# EAGLE board Uno (EAGLE 6.1)
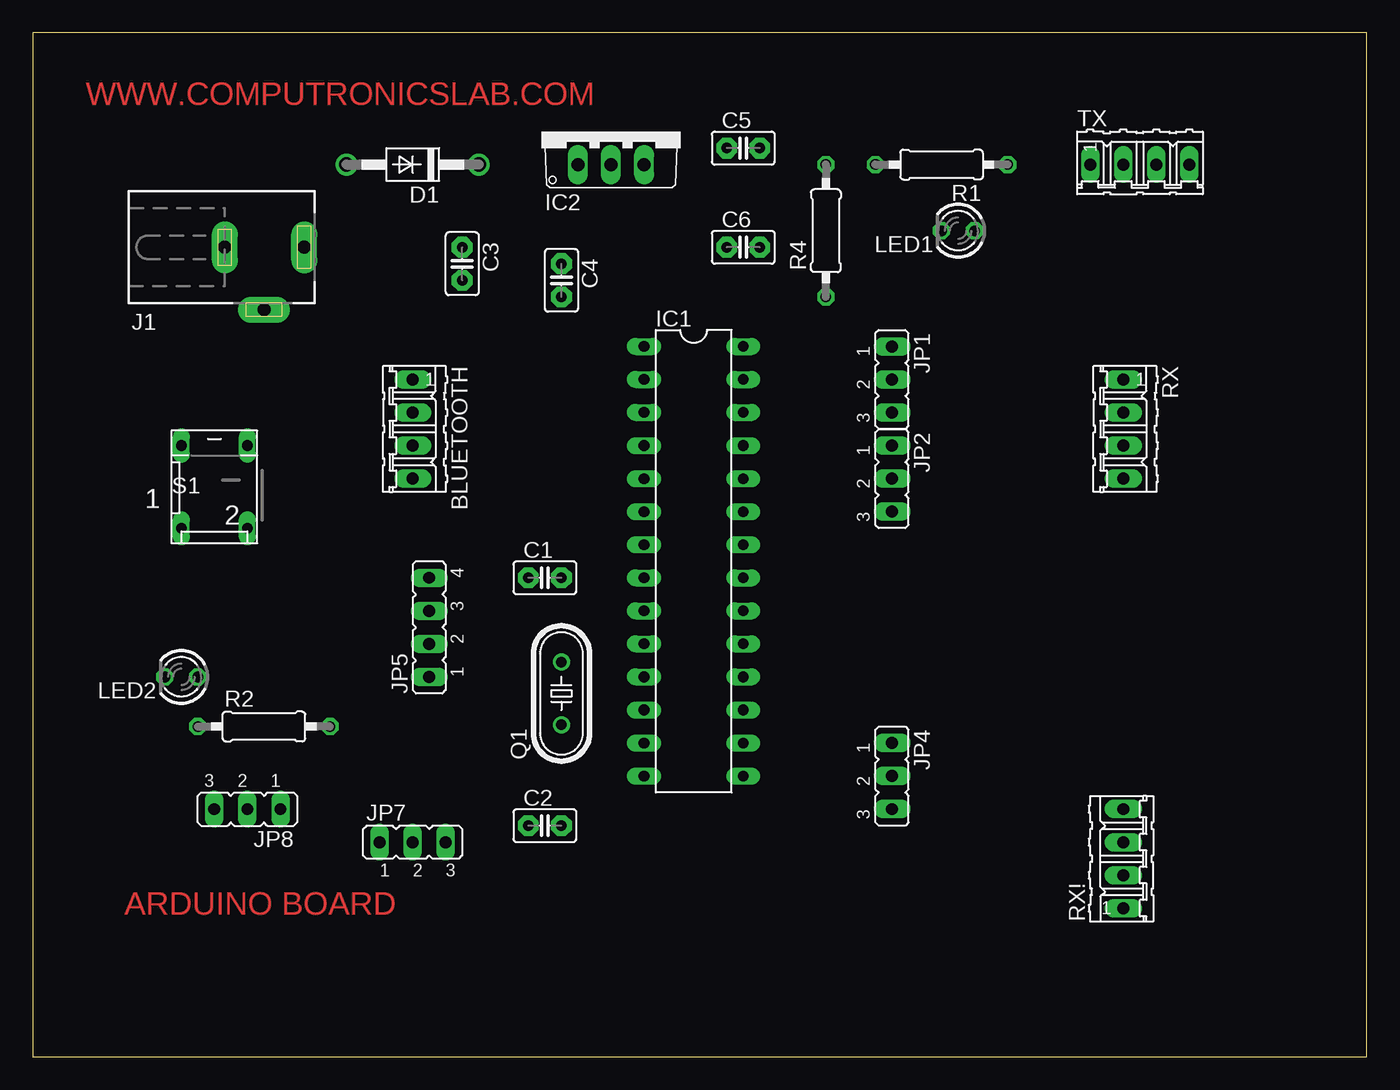
[diagram p0: board, top side]
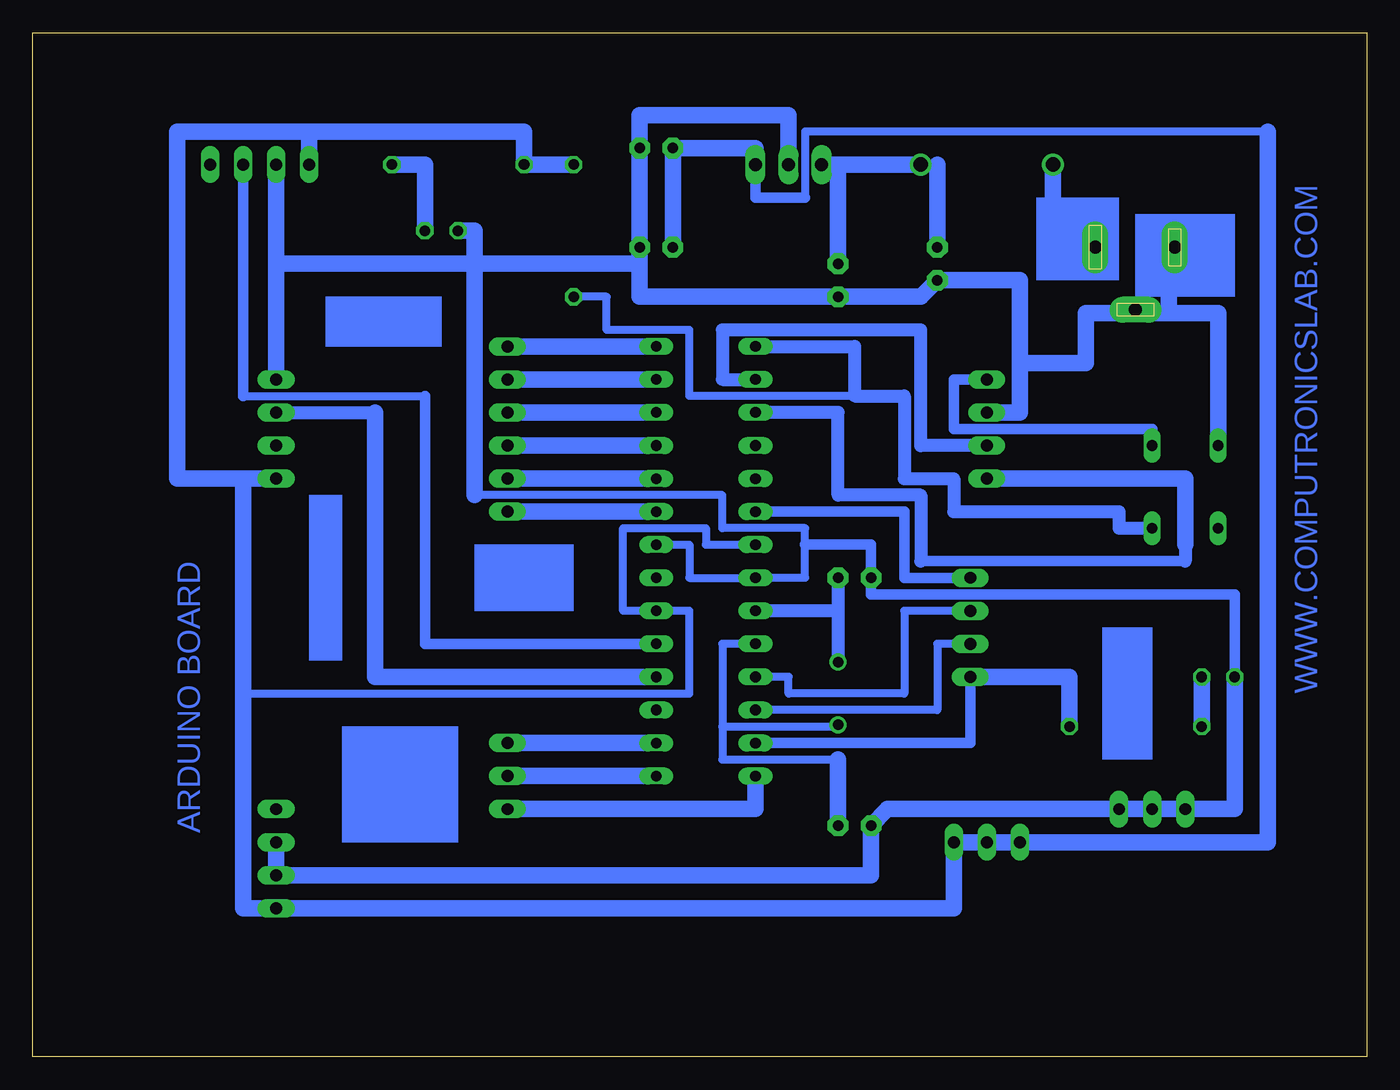
[diagram p1: board, bottom side, seen from below]

Size 102.54 x 78.73 mm. Coordinates in mm from the lower left corner, seen from the top.
Outline: 0,0 102.54,0 102.54,78.73 0,78.73 0,0
Copper layers (1*16): Top 0.035mm / dielectric 1.5mm / Bottom 0.035mm
Design rules: minimum track width 20mil, minimum drill 24mil, track to track 8mil, track to pad 8mil, pad to pad 8mil, via to via 8mil, smd to smd 8mil, copper to edge 40mil, drill to drill 8mil, minimum pad ring 10mil, minimum via ring 8mil, stop-mask expansion 4mil, vias tented up to drill 0mil, thermal gap 10mil

## Footprints (pad centres in the part's own frame; a part is rotated, then mirrored left to right if it is on the bottom)
04P = drill 0.914 long: 1 -3.81,0; 2 -1.27,0; 3 1.27,0; 4 3.81,0
C2.5-2 = drill 0.813 pad 1.6 octagon: 1 -1.27,0; 2 1.27,0
DO41-10 = drill 1.118: A 5.08,0; C -5.08,0
DIL28-3 = drill 0.813 long: 1 -16.51,-3.81; 2 -13.97,-3.81; 3 -11.43,-3.81; 4 -8.89,-3.81; 5 -6.35,-3.81; 6 -3.81,-3.81; 7 -1.27,-3.81; 8 1.27,-3.81; 9 3.81,-3.81; 10 6.35,-3.81; 11 8.89,-3.81; 12 11.43,-3.81; 13 13.97,-3.81; 14 16.51,-3.81; 15 16.51,3.81; 16 13.97,3.81; 17 11.43,3.81; 18 8.89,3.81; 19 6.35,3.81; 20 3.81,3.81; 21 1.27,3.81; 22 -1.27,3.81; 23 -3.81,3.81; 24 -6.35,3.81; 25 -8.89,3.81; 26 -11.43,3.81; 27 -13.97,3.81; 28 -16.51,3.81
TO220V = drill 1.016 long: 1 -2.54,-2.54; 2 0,-2.54; 3 2.54,-2.54
DCJ0303 = drill 1 pad 2 long: 1 0,3.1; 2 4.8,0; 3 0,-3
JP2 = drill 0.914 long: 1 -2.54,0; 2 0,0; 3 2.54,0
JP4 = drill 0.914 long: 1 -3.81,0; 2 -1.27,0; 3 1.27,0; 4 3.81,0
LED3MM = drill 0.813 octagon: A -1.27,0; K 1.27,0
HC49/S = drill 0.813: 1 -2.413,0; 2 2.413,0
0207/10 = drill 0.813 octagon: 1 -5.08,0; 2 5.08,0
DP-02 = drill 0.813 long: 1 -2.54,-2.54; 2 2.54,-2.54; 3 2.54,3.81; 4 -2.54,3.81

## Placement (x,y rotation side)
BLUETOOTH  [04P]  29.21,48.26 270 top
C1  22pf  [C2.5-2]  39.37,36.83 0 top
C2  22pf  [C2.5-2]  39.37,17.78 0 top
C3  100UF  [C2.5-2]  33.02,60.96 270 top
C4  0.1uf  [C2.5-2]  40.64,59.69 270 top
C5  0.1uf  [C2.5-2]  54.61,69.85 0 top
C6  4.7uf  [C2.5-2]  54.61,62.23 0 top
D1  1N4007  [DO41-10]  29.21,68.58 180 top
IC1  ATMEGA328  [DIL28-3]  50.8,38.1 270 top
IC2  7805  [TO220V]  44.45,71.12 0 top
J1  [DCJ0303]  17.78,62.23 270 top
JP1  [JP2]  66.04,52.07 270 top
JP2  [JP2]  66.04,44.45 270 top
JP4  [JP2]  66.04,21.59 270 top
JP5  [JP4]  30.48,33.02 90 top
JP7  [JP2]  29.21,16.51 0 top
JP8  [JP2]  16.51,19.05 180 top
LED1  [LED3MM]  71.12,63.5 180 top
LED2  [LED3MM]  11.43,29.21 180 top
Q1  12MHZ  [HC49/S]  40.64,27.94 90 top
R1  220R  [0207/10]  69.85,68.58 180 top
R2  330R  [0207/10]  17.78,25.4 0 top
R4  10K  [0207/10]  60.96,63.5 90 top
RX  [04P]  83.82,48.26 270 top
RX!  [04P]  83.82,15.24 90 top
S1  [DP-02]  13.97,43.18 0 top
TX  [04P]  85.09,68.58 0 top

## Library data of the parts
BLUETOOTH RX RX! TX = con-amp-quick; OC_FARNELL: unknown; OC_NEWARK: unknown
C1-C6 = capacitor-wima
D1 = diode
IC1 = quantum-research-group; OC_FARNELL: unknown; OC_NEWARK: unknown
IC2 = linear
J1 = con-jack; OC_FARNELL: unknown; OC_NEWARK: unknown
JP1 JP2 JP4 JP5 JP7 JP8 = jumper
LED1 LED2 = led
Q1 = crystal; OC_FARNELL: 1667008; OC_NEWARK: unknown
R1 R2 R4 = rcl
S1 = switch-dil; MPN: MCDP02; OC_FARNELL: 1255233; OC_NEWARK: 26M1095

## Nets
N$1: C1.2 IC1.9 Q1.2
N$2: C2.2 IC1.10 Q1.1
N$3: D1.A J1.1
N$4: C5.1 C6.1 IC1.7 IC1.20 IC2.3 JP7.1 JP7.2 JP7.3 R1.2 R4.2 RX!.1 RX.4 TX.1
N$5: BLUETOOTH.2 C1.1 C2.1 C3.2 C4.2 C5.2 C6.2 IC1.8 IC1.22 IC2.2 J1.2 J1.3 JP8.1 JP8.2 JP8.3 LED1.K LED2.K RX!.2 RX!.3 RX.1 S1.4 TX.2
N$6: LED1.A R1.1
N$7: C3.1 C4.1 D1.C IC2.1
N$8: IC1.28 JP1.1
N$9: IC1.27 JP1.2
N$10: IC1.26 JP1.3
N$11: IC1.25 JP2.1
N$12: IC1.24 JP2.2
N$13: IC1.23 JP2.3
N$14: BLUETOOTH.3 IC1.2
N$16: BLUETOOTH.1 S1.3
N$17: BLUETOOTH.4 IC1.3
N$18: IC1.6 JP5.4
N$19: IC1.12 JP5.2
N$20: IC1.11 JP5.3
N$21: IC1.13 JP5.1 R2.2
N$22: IC1.14 JP4.3
N$23: IC1.15 JP4.2
N$24: IC1.16 JP4.1
N$26: IC1.18 RX.2
N$27: IC1.19 TX.3
N$31: IC1.1 R4.1 S1.2
N$32: LED2.A R2.1

## Tracks (layer width: path | path; a pad name or v marks a point on that pad's centre or on a via)
N$1
  Bottom 1.016: C1.2 40.64,34.29 | 40.64,34.29 Q1.2 | 40.64,34.29 IC1.9
N$2
  Bottom 0.508: 40.64,25.4 Q1.1
  Bottom 0.61: 49.53,25.4 40.64,25.4 | 49.53,25.4 49.53,31.75 IC1.10 | 40.64,22.86 49.53,22.86 49.53,25.4
  Bottom 1.27: 40.64,22.86 C2.2
N$3
  Bottom 1.27: D1.A 24.13,62.23 J1.1
N$4
  Bottom 0.508: 81.28,69.85 TX.1
  Bottom 0.61: IC1.7 50.8,39.37 50.8,40.64 57.15,40.64 57.15,34.29 IC1.20 52.07,34.29 52.07,27.94 86.36,27.94 | 43.18,66.04 43.18,71.12 7.62,71.12
  Bottom 0.813: 43.18,66.04 46.99,66.04 IC2.3
  Bottom 1.27: R4.2 R1.2 64.77,71.12 81.28,71.12 | 81.28,71.12 TX.1 | IC2.3 46.99,69.85 C5.1 C6.1 | 86.36,44.45 86.36,27.94 86.36,11.43 RX!.1 31.75,11.43 JP7.3 JP7.2 JP7.1 7.62,16.51 7.62,71.12 | RX.4 86.36,44.45 | 81.28,71.12 91.44,71.12 91.44,44.45 86.36,44.45
N$5
  Bottom 0.508: 15.24,62.23 J1.3 | C6.2 55.88,60.96
  Bottom 0.61: IC1.22 52.07,39.37 52.07,36.83 IC1.8 43.18,36.83 43.18,39.37 43.18,40.64 49.53,40.64 49.53,43.18 68.58,43.18
  Bottom 0.813: 43.18,39.37 38.1,39.37 C1.1 38.1,35.56 10.16,35.56 LED2.K
  Bottom 1.27: S1.4 11.43,57.15 15.24,57.15 | 17.78,57.15 15.24,57.15 | 26.67,53.34 21.59,53.34 21.59,57.15 17.78,57.15 | 26.67,53.34 26.67,49.53 BLUETOOTH.2 | 17.78,57.15 J1.2 | 15.24,57.15 15.24,62.23 | 26.67,53.34 26.67,59.69 C3.2 34.29,58.42 C4.2 55.88,58.42 C6.2 C5.2 55.88,72.39 44.45,72.39 IC2.2 | TX.2 83.82,60.96 | 83.82,60.96 RX.1 | 68.58,60.96 68.58,63.5 LED1.K | 55.88,60.96 68.58,60.96 | 68.58,60.96 83.82,60.96 | LED2.K 10.16,19.05 JP8.3 JP8.2 JP8.1 36.83,19.05 C2.1 38.1,13.97 RX!.2 RX!.3 | 68.58,43.18 68.58,60.96
N$6
  Bottom 1.27: LED1.A 72.39,68.58 R1.1
N$7
  Bottom 0.508: D1.C 33.02,68.58
  Bottom 1.27: D1.C 40.64,68.58 | 40.64,68.58 IC2.1 | 33.02,68.58 C3.1 | 40.64,68.58 C4.1
N$8
  Bottom 1.27: JP1.1 IC1.28
N$9
  Bottom 1.27: JP1.2 IC1.27
N$10
  Bottom 1.27: JP1.3 IC1.26
N$11
  Bottom 1.27: JP2.1 IC1.25
N$12
  Bottom 1.27: JP2.2 IC1.24
N$13
  Bottom 1.27: JP2.3 IC1.23
N$14
  Bottom 1.016: IC1.2 49.53,52.07 49.53,55.88 34.29,55.88 34.29,46.99 BLUETOOTH.3
N$16
  Bottom 0.813: S1.3 16.51,48.26 31.75,48.26 31.75,52.07 BLUETOOTH.1
N$17
  Bottom 0.813: 13.97,38.1 34.29,38.1
  Bottom 1.016: IC1.3 40.64,49.53 40.64,43.18 34.29,43.18 34.29,38.1 | 13.97,39.37 13.97,38.1
  Bottom 1.27: 13.97,39.37 13.97,44.45 BLUETOOTH.4
N$18
  Bottom 0.813: IC1.6 35.56,41.91 35.56,36.83 JP5.4
N$19
  Bottom 0.61: IC1.12 33.02,26.67 33.02,31.75 JP5.2
N$20
  Bottom 0.61: IC1.11 44.45,29.21 44.45,27.94 35.56,27.94 35.56,34.29 JP5.3
N$21
  Bottom 0.813: IC1.13 30.48,24.13 JP5.1
  Bottom 1.27: R2.2 22.86,29.21 JP5.1
N$22
  Bottom 1.27: IC1.14 46.99,19.05 JP4.3
N$23
  Bottom 1.27: JP4.2 IC1.15
N$24
  Bottom 1.27: JP4.1 IC1.16
N$26
  Bottom 1.016: RX.2 76.2,49.53
  Bottom 1.27: IC1.18 76.2,29.21 76.2,49.53
N$27
  Bottom 0.61: 86.36,50.8 72.39,50.8
  Bottom 0.813: IC1.19 72.39,31.75 72.39,50.8 | TX.3 86.36,50.8
N$31
  Bottom 0.61: R4.1 58.42,58.42 58.42,55.88 52.07,55.88 52.07,50.8 39.37,50.8
  Bottom 1.016: S1.2 19.05,40.64 19.05,41.91 31.75,41.91 31.75,44.45 35.56,44.45 35.56,50.8 39.37,50.8 39.37,54.61 IC1.1
N$32
  Bottom 1.27: LED2.A R2.1
(copper drawn outside any net)
  shapes: Bottom area x7

## Text on the board
Top: WWW.COMPUTRONICSLAB.COM | ARDUINO BOARD
Bottom: ARDUINO BOARD | WWW.COMPUTRONICSLAB.COM